# EAGLE board Serial-7-Segment-Display_Panel_v31b (EAGLE 7.5.0), part 1 of 6
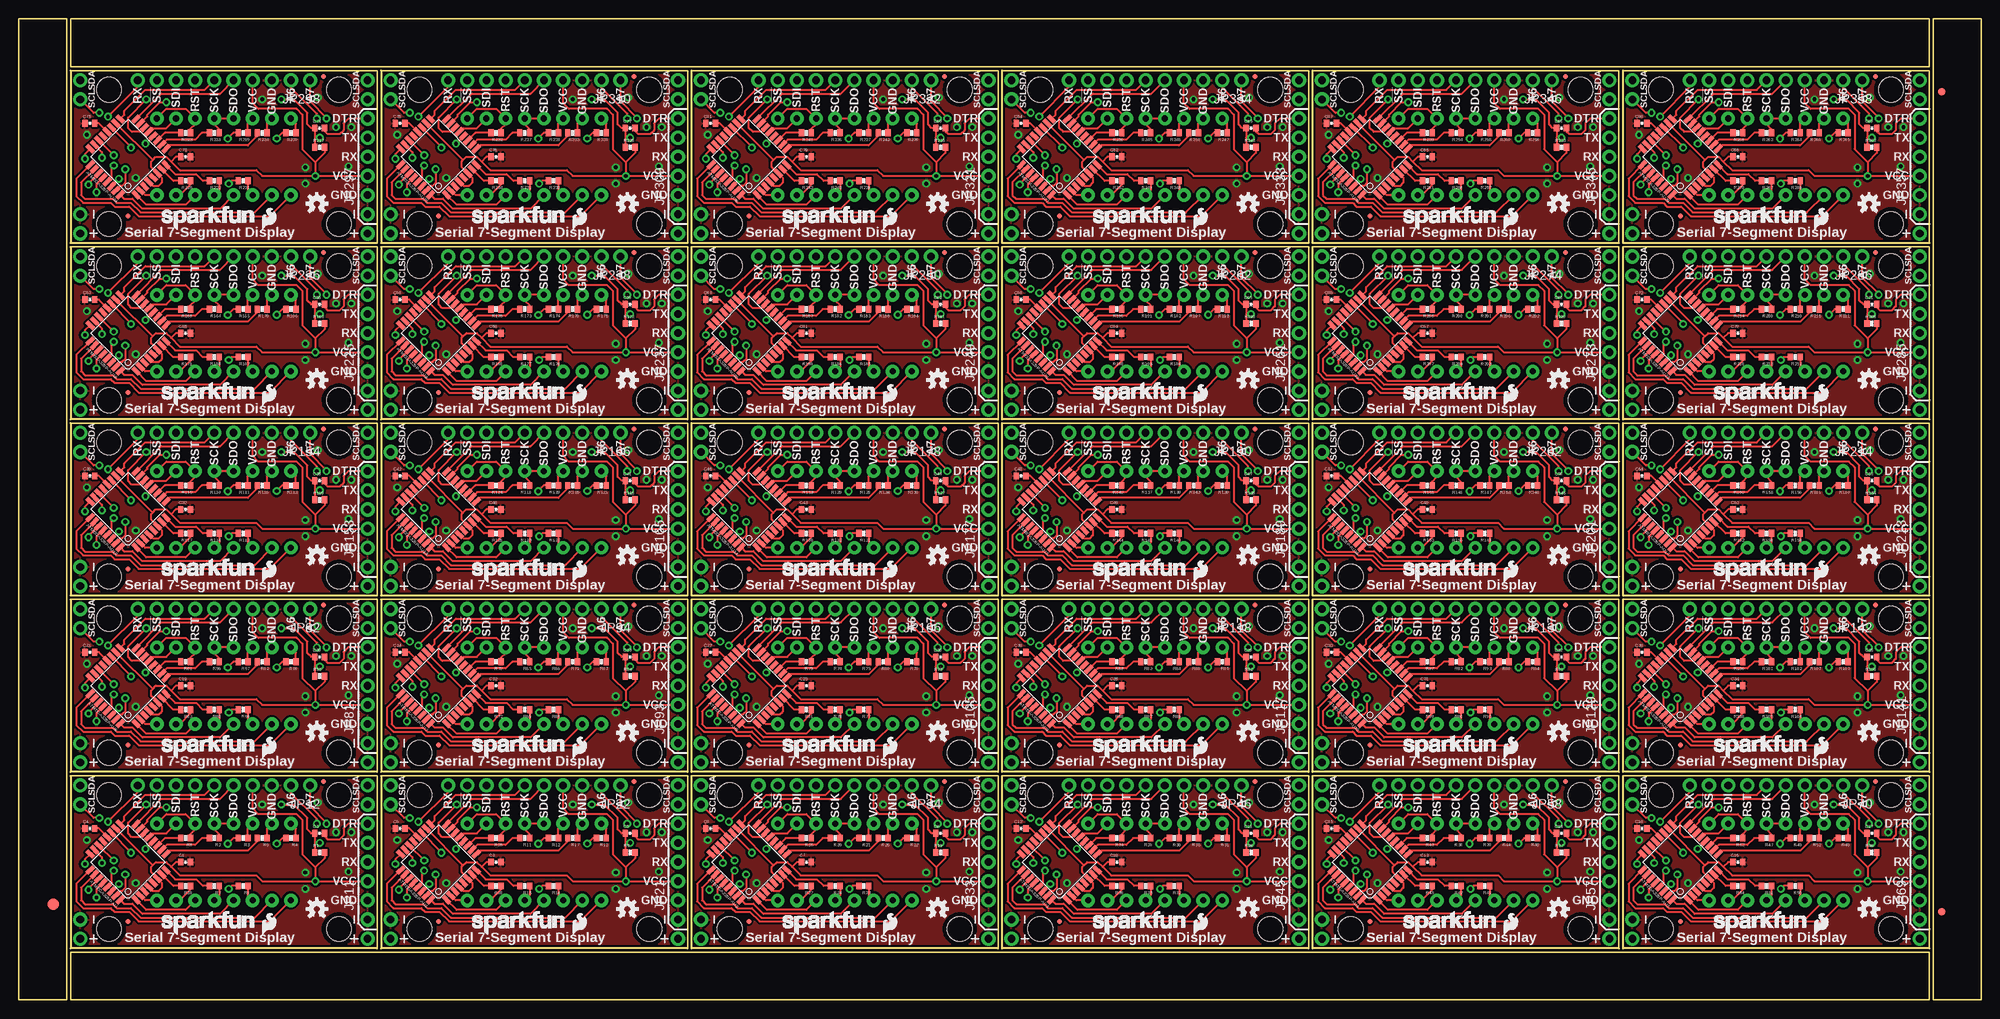
[diagram p0: board, top side]
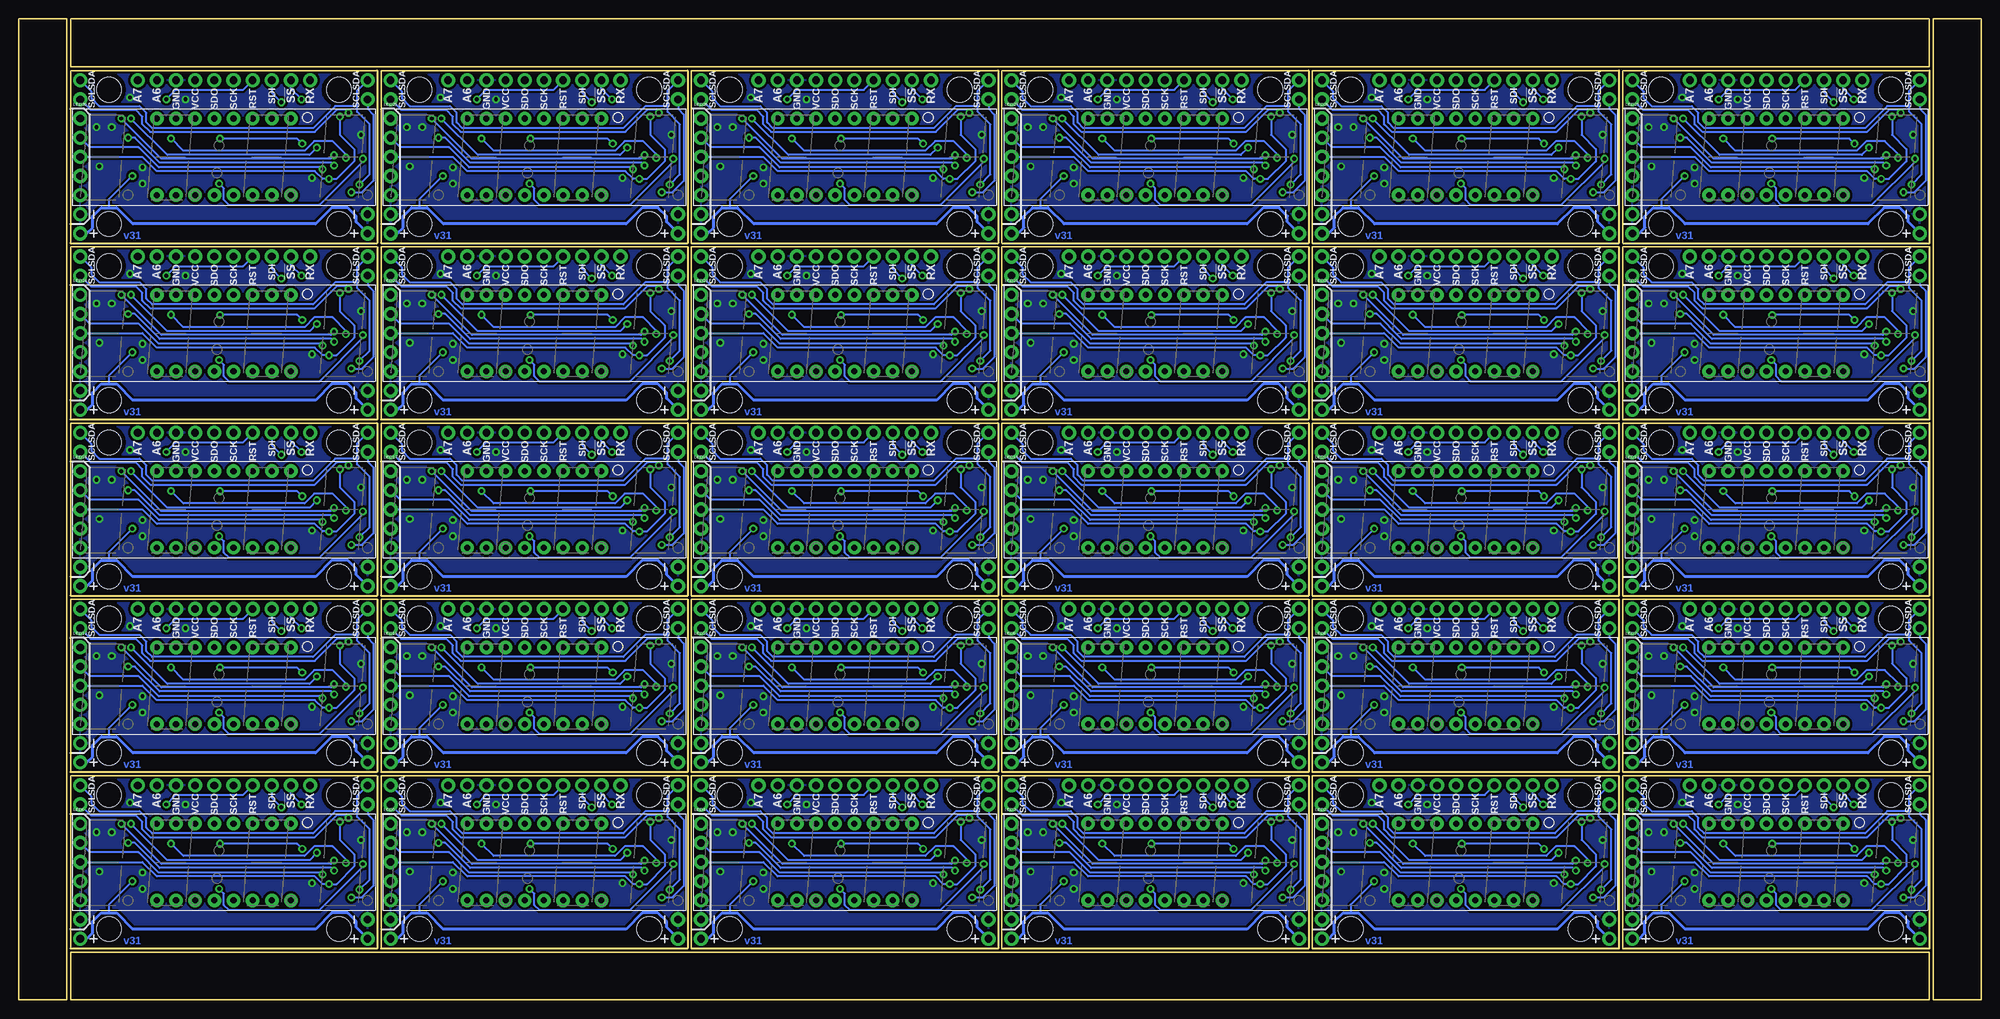
[diagram p1: board, bottom side, seen from below]

Size 260.1 x 130.05 mm. Coordinates in mm from the lower left corner, seen from the top.
Outline: 6.35,79.25 6.35,0 0,0 0,29.72
Outline: 0,27.18 0,130.05 6.35,130.05 6.35,76.71
Outline: 79.25,0 6.86,0 6.86,6.35 29.72,6.35
Outline: 27.18,6.35 253.24,6.35 253.24,0 76.71,0
Outline: 260.1,79.25 260.1,0 253.75,0 253.75,29.72
Outline: 253.75,27.18 253.75,130.05 260.1,130.05 260.1,76.71
Outline: 180.85,130.05 253.24,130.05 253.24,123.7 230.38,123.7
Outline: 232.92,123.7 6.86,123.7 6.86,130.05 183.39,130.05
Outline: 6.86,29.72 47.5,29.72 47.5,6.86 6.86,6.86 6.86,29.72
Outline: 48.01,29.72 88.65,29.72 88.65,6.86 48.01,6.86 48.01,29.72
Outline: 89.15,29.72 129.79,29.72 129.79,6.86 89.15,6.86 89.15,29.72
Outline: 130.3,29.72 170.94,29.72 170.94,6.86 130.3,6.86 130.3,29.72
Outline: 171.45,29.72 212.09,29.72 212.09,6.86 171.45,6.86 171.45,29.72
Outline: 212.6,29.72 253.24,29.72 253.24,6.86 212.6,6.86 212.6,29.72
Outline: 6.86,53.09 47.5,53.09 47.5,30.23 6.86,30.23 6.86,53.09
Outline: 48.01,53.09 88.65,53.09 88.65,30.23 48.01,30.23 48.01,53.09
Outline: 89.15,53.09 129.79,53.09 129.79,30.23 89.15,30.23 89.15,53.09
Outline: 130.3,53.09 170.94,53.09 170.94,30.23 130.3,30.23 130.3,53.09
Outline: 171.45,53.09 212.09,53.09 212.09,30.23 171.45,30.23 171.45,53.09
Outline: 212.6,53.09 253.24,53.09 253.24,30.23 212.6,30.23 212.6,53.09
Outline: 6.86,76.45 47.5,76.45 47.5,53.59 6.86,53.59 6.86,76.45
Outline: 48.01,76.45 88.65,76.45 88.65,53.59 48.01,53.59 48.01,76.45
Outline: 89.15,76.45 129.79,76.45 129.79,53.59 89.15,53.59 89.15,76.45
Outline: 130.3,76.45 170.94,76.45 170.94,53.59 130.3,53.59 130.3,76.45
Outline: 171.45,76.45 212.09,76.45 212.09,53.59 171.45,53.59 171.45,76.45
Outline: 212.6,76.45 253.24,76.45 253.24,53.59 212.6,53.59 212.6,76.45
Outline: 6.86,99.82 47.5,99.82 47.5,76.96 6.86,76.96 6.86,99.82
Outline: 48.01,99.82 88.65,99.82 88.65,76.96 48.01,76.96 48.01,99.82
Outline: 89.15,99.82 129.79,99.82 129.79,76.96 89.15,76.96 89.15,99.82
Outline: 130.3,99.82 170.94,99.82 170.94,76.96 130.3,76.96 130.3,99.82
Outline: 171.45,99.82 212.09,99.82 212.09,76.96 171.45,76.96 171.45,99.82
Outline: 212.6,99.82 253.24,99.82 253.24,76.96 212.6,76.96 212.6,99.82
Outline: 6.86,123.19 47.5,123.19 47.5,100.33 6.86,100.33 6.86,123.19
Outline: 48.01,123.19 88.65,123.19 88.65,100.33 48.01,100.33 48.01,123.19
Outline: 89.15,123.19 129.79,123.19 129.79,100.33 89.15,100.33 89.15,123.19
Outline: 130.3,123.19 170.94,123.19 170.94,100.33 130.3,100.33 130.3,123.19
Outline: 171.45,123.19 212.09,123.19 212.09,100.33 171.45,100.33 171.45,123.19
Outline: 212.6,123.19 253.24,123.19 253.24,100.33 212.6,100.33 212.6,123.19
Copper layers (1*16): Top 0.035mm / dielectric 1.5mm / Bottom 0.035mm
Design rules "default": minimum track width 8mil, minimum drill 20mil, track to track 8mil, track to pad 8mil, pad to pad 8mil, via to via 8mil, smd to smd 8mil, copper to edge 8mil, drill to drill 8mil, minimum pad ring 12mil, minimum via ring 10mil, stop-mask expansion 4mil, vias tented up to drill 20mil, thermal gap 10mil

## Footprints (pad centres in the part's own frame; a part is rotated, then mirrored left to right if it is on the bottom)
TQFP32-08 = smd 1.27 x 0.559: 1 -4.293,2.8; 2 -4.293,2; 3 -4.293,1.2; 4 -4.293,0.4; 5 -4.293,-0.4; 6 -4.293,-1.2; 7 -4.293,-2; 8 -4.293,-2.8; 17 4.293,-2.8; 18 4.293,-2; 19 4.293,-1.2; 20 4.293,-0.4; 21 4.293,0.4; 22 4.293,1.2; 23 4.293,2; 24 4.293,2.8 | smd 0.559 x 1.27: 9 -2.8,-4.293; 10 -2,-4.293; 11 -1.2,-4.293; 12 -0.4,-4.293; 13 0.4,-4.293; 14 1.2,-4.293; 15 2,-4.293; 16 2.8,-4.293; 25 2.8,4.293; 26 2,4.293; 27 1.2,4.293; 28 0.4,4.293; 29 -0.4,4.293; 30 -1.2,4.293; 31 -2,4.293; 32 -2.8,4.293
0402-CAP = smd 0.7 x 0.9: 1 -0.65,0; 2 0.65,0
FIDUCIAL-1.5X3 = smd 1.5 x 1.5: 1 0,0
FIDUCIAL-1X2 = smd 1 x 1: 1 0,0
STAND-OFF = hole 3.302: 0,0
1X02_NO_SILK = drill 1.016 pad 1.88: 1 0,0; 2 2.54,0
MICRO-FIDUCIAL = smd 0.635 x 0.635: 1 0,0
1X05_NO_SILK = drill 1.016 pad 1.88: 1 0,0; 2 2.54,0; 3 5.08,0; 4 7.62,0; 5 10.16,0
1X10_NO_SILK = drill 1.016 pad 1.88: 1 0,0; 2 2.54,0; 3 5.08,0; 4 7.62,0; 5 10.16,0; 6 12.7,0; 7 15.24,0; 8 17.78,0; 9 20.32,0; 10 22.86,0
7-SEGMENT-4DIGIT-YOUNGSUN = drill 0.8 pad 1.778: 1 -8.89,-5.08; 2 -6.35,-5.08; 3 -3.81,-5.08; 4 -1.27,-5.08; 5 1.27,-5.08; 6 3.81,-5.08; 7 6.35,-5.08; 8 8.89,-5.08; 9 8.89,5.08; 10 6.35,5.08; 11 3.81,5.08; 12 1.27,5.08; 13 -1.27,5.08; 14 -3.81,5.08; 15 -6.35,5.08; 16 -8.89,5.08
0402-RES = smd 0.7 x 0.9: 1 -0.65,0; 2 0.65,0

## Placement (x,y rotation side)
ATMEGA328P-AU  ATMEGA328P-AU  [TQFP32-08]  14.48,18.29 135 top
ATMEGA328P-AU1  ATMEGA328P-AU  [TQFP32-08]  55.63,18.29 135 top
ATMEGA328P-AU2  ATMEGA328P-AU  [TQFP32-08]  96.77,18.29 135 top
ATMEGA328P-AU3  ATMEGA328P-AU  [TQFP32-08]  137.92,18.29 135 top
ATMEGA328P-AU4  ATMEGA328P-AU  [TQFP32-08]  179.07,18.29 135 top
ATMEGA328P-AU5  ATMEGA328P-AU  [TQFP32-08]  220.22,18.29 135 top
ATMEGA328P-AU6  ATMEGA328P-AU  [TQFP32-08]  14.48,41.66 135 top
ATMEGA328P-AU7  ATMEGA328P-AU  [TQFP32-08]  55.63,41.66 135 top
ATMEGA328P-AU8  ATMEGA328P-AU  [TQFP32-08]  96.77,41.66 135 top
ATMEGA328P-AU9  ATMEGA328P-AU  [TQFP32-08]  137.92,41.66 135 top
ATMEGA328P-AU10  ATMEGA328P-AU  [TQFP32-08]  179.07,41.66 135 top
ATMEGA328P-AU11  ATMEGA328P-AU  [TQFP32-08]  220.22,41.66 135 top
ATMEGA328P-AU12  ATMEGA328P-AU  [TQFP32-08]  14.48,65.02 135 top
ATMEGA328P-AU13  ATMEGA328P-AU  [TQFP32-08]  55.63,65.02 135 top
ATMEGA328P-AU14  ATMEGA328P-AU  [TQFP32-08]  96.77,65.02 135 top
ATMEGA328P-AU15  ATMEGA328P-AU  [TQFP32-08]  137.92,65.02 135 top
ATMEGA328P-AU16  ATMEGA328P-AU  [TQFP32-08]  179.07,65.02 135 top
ATMEGA328P-AU17  ATMEGA328P-AU  [TQFP32-08]  220.22,65.02 135 top
ATMEGA328P-AU18  ATMEGA328P-AU  [TQFP32-08]  14.48,88.39 135 top
ATMEGA328P-AU19  ATMEGA328P-AU  [TQFP32-08]  55.63,88.39 135 top
ATMEGA328P-AU20  ATMEGA328P-AU  [TQFP32-08]  96.77,88.39 135 top
ATMEGA328P-AU21  ATMEGA328P-AU  [TQFP32-08]  137.92,88.39 135 top
ATMEGA328P-AU22  ATMEGA328P-AU  [TQFP32-08]  179.07,88.39 135 top
ATMEGA328P-AU23  ATMEGA328P-AU  [TQFP32-08]  220.22,88.39 135 top
ATMEGA328P-AU24  ATMEGA328P-AU  [TQFP32-08]  14.48,111.76 135 top
ATMEGA328P-AU25  ATMEGA328P-AU  [TQFP32-08]  55.63,111.76 135 top
ATMEGA328P-AU26  ATMEGA328P-AU  [TQFP32-08]  96.77,111.76 135 top
ATMEGA328P-AU27  ATMEGA328P-AU  [TQFP32-08]  137.92,111.76 135 top
ATMEGA328P-AU28  ATMEGA328P-AU  [TQFP32-08]  179.07,111.76 135 top
ATMEGA328P-AU29  ATMEGA328P-AU  [TQFP32-08]  220.22,111.76 135 top
C1  0.1uF  [0402-CAP]  22.1,18.29 0 top
C2  0.1uF  [0402-CAP]  63.25,18.29 0 top
C3  0.1uF  [0402-CAP]  39.88,22.1 0 top
C4  0.1uF  [0402-CAP]  9.4,22.73 0 top
C5  0.1uF  [0402-CAP]  81.03,22.1 0 top
C6  0.1uF  [0402-CAP]  50.55,22.73 0 top
C7  0.1uF  [0402-CAP]  104.39,18.29 0 top
C8  0.1uF  [0402-CAP]  122.17,22.1 0 top
C9  0.1uF  [0402-CAP]  91.69,22.73 0 top
C10  0.1uF  [0402-CAP]  145.54,18.29 0 top
C11  0.1uF  [0402-CAP]  163.32,22.1 0 top
C12  0.1uF  [0402-CAP]  132.84,22.73 0 top
C13  0.1uF  [0402-CAP]  186.69,18.29 0 top
C14  0.1uF  [0402-CAP]  204.47,22.1 0 top
C15  0.1uF  [0402-CAP]  173.99,22.73 0 top
C16  0.1uF  [0402-CAP]  227.84,18.29 0 top
C17  0.1uF  [0402-CAP]  245.62,22.1 0 top
C18  0.1uF  [0402-CAP]  215.14,22.73 0 top
C19  0.1uF  [0402-CAP]  22.1,41.66 0 top
C20  0.1uF  [0402-CAP]  39.88,45.47 0 top
C21  0.1uF  [0402-CAP]  9.4,46.1 0 top
C22  0.1uF  [0402-CAP]  63.25,41.66 0 top
C23  0.1uF  [0402-CAP]  81.03,45.47 0 top
C24  0.1uF  [0402-CAP]  50.55,46.1 0 top
C25  0.1uF  [0402-CAP]  104.39,41.66 0 top
C26  0.1uF  [0402-CAP]  122.17,45.47 0 top
C27  0.1uF  [0402-CAP]  91.69,46.1 0 top
C28  0.1uF  [0402-CAP]  145.54,41.66 0 top
C29  0.1uF  [0402-CAP]  163.32,45.47 0 top
C30  0.1uF  [0402-CAP]  132.84,46.1 0 top
C31  0.1uF  [0402-CAP]  186.69,41.66 0 top
C32  0.1uF  [0402-CAP]  204.47,45.47 0 top
C33  0.1uF  [0402-CAP]  173.99,46.1 0 top
C34  0.1uF  [0402-CAP]  227.84,41.66 0 top
C35  0.1uF  [0402-CAP]  245.62,45.47 0 top
C36  0.1uF  [0402-CAP]  215.14,46.1 0 top
C37  0.1uF  [0402-CAP]  22.1,65.02 0 top
C38  0.1uF  [0402-CAP]  39.88,68.83 0 top
C39  0.1uF  [0402-CAP]  9.4,69.47 0 top
C40  0.1uF  [0402-CAP]  63.25,65.02 0 top
C41  0.1uF  [0402-CAP]  81.03,68.83 0 top
C42  0.1uF  [0402-CAP]  50.55,69.47 0 top
C43  0.1uF  [0402-CAP]  104.39,65.02 0 top
C44  0.1uF  [0402-CAP]  122.17,68.83 0 top
C45  0.1uF  [0402-CAP]  91.69,69.47 0 top
C46  0.1uF  [0402-CAP]  145.54,65.02 0 top
C47  0.1uF  [0402-CAP]  163.32,68.83 0 top
C48  0.1uF  [0402-CAP]  132.84,69.47 0 top
C49  0.1uF  [0402-CAP]  186.69,65.02 0 top
C50  0.1uF  [0402-CAP]  204.47,68.83 0 top
C51  0.1uF  [0402-CAP]  173.99,69.47 0 top
C52  0.1uF  [0402-CAP]  227.84,65.02 0 top
C53  0.1uF  [0402-CAP]  245.62,68.83 0 top
C54  0.1uF  [0402-CAP]  215.14,69.47 0 top
C55  0.1uF  [0402-CAP]  22.1,88.39 0 top
C56  0.1uF  [0402-CAP]  39.88,92.2 0 top
C57  0.1uF  [0402-CAP]  9.4,92.84 0 top
C58  0.1uF  [0402-CAP]  63.25,88.39 0 top
C59  0.1uF  [0402-CAP]  81.03,92.2 0 top
C60  0.1uF  [0402-CAP]  50.55,92.84 0 top
C61  0.1uF  [0402-CAP]  104.39,88.39 0 top
C62  0.1uF  [0402-CAP]  122.17,92.2 0 top
C63  0.1uF  [0402-CAP]  91.69,92.84 0 top
C64  0.1uF  [0402-CAP]  145.54,88.39 0 top
C65  0.1uF  [0402-CAP]  163.32,92.2 0 top
C66  0.1uF  [0402-CAP]  132.84,92.84 0 top
C67  0.1uF  [0402-CAP]  186.69,88.39 0 top
C68  0.1uF  [0402-CAP]  204.47,92.2 0 top
C69  0.1uF  [0402-CAP]  173.99,92.84 0 top
C70  0.1uF  [0402-CAP]  227.84,88.39 0 top
C71  0.1uF  [0402-CAP]  245.62,92.2 0 top
C72  0.1uF  [0402-CAP]  215.14,92.84 0 top
C73  0.1uF  [0402-CAP]  22.1,111.76 0 top
C74  0.1uF  [0402-CAP]  39.88,115.57 0 top
C75  0.1uF  [0402-CAP]  9.4,116.2 0 top
C76  0.1uF  [0402-CAP]  63.25,111.76 0 top
C77  0.1uF  [0402-CAP]  81.03,115.57 0 top
C78  0.1uF  [0402-CAP]  50.55,116.2 0 top
C79  0.1uF  [0402-CAP]  104.39,111.76 0 top
C80  0.1uF  [0402-CAP]  122.17,115.57 0 top
C81  0.1uF  [0402-CAP]  91.69,116.2 0 top
C82  0.1uF  [0402-CAP]  145.54,111.76 0 top
C83  0.1uF  [0402-CAP]  163.32,115.57 0 top
C84  0.1uF  [0402-CAP]  132.84,116.2 0 top
C85  0.1uF  [0402-CAP]  186.69,111.76 0 top
C86  0.1uF  [0402-CAP]  204.47,115.57 0 top
C87  0.1uF  [0402-CAP]  173.99,116.2 0 top
C88  0.1uF  [0402-CAP]  227.84,111.76 0 top
C89  0.1uF  [0402-CAP]  245.62,115.57 0 top
C90  0.1uF  [0402-CAP]  215.14,116.2 0 top
E$1  [FIDUCIAL-1.5X3]  4.57,12.7 0 top
E$5  [FIDUCIAL-1X2]  254.89,11.68 0 top
E$6  [FIDUCIAL-1X2]  254.89,120.4 180 top
JP1  STAND-OFF  [STAND-OFF]  11.94,9.4 0 top
JP2  [1X02_NO_SILK]  46.23,28.45 270 top
JP3  STAND-OFF  [STAND-OFF]  11.94,27.18 0 top
JP4  STAND-OFF  [STAND-OFF]  42.42,9.4 0 top
JP5  STAND-OFF  [STAND-OFF]  42.42,27.18 0 top
JP6  [1X02_NO_SILK]  8.13,8.13 90 top
JP7  [1X02_NO_SILK]  8.13,28.45 270 top
JP8  [1X02_NO_SILK]  46.23,8.13 90 top
JP9  FIDUCIALUFIDUCIAL  [MICRO-FIDUCIAL]  40.39,28.96 0 top
JP10  FIDUCIALUFIDUCIAL  [MICRO-FIDUCIAL]  14.48,10.41 0 top
JP11  [1X05_NO_SILK]  46.23,13.21 90 top
JP12  M10SIP_NS  [1X10_NO_SILK]  38.61,28.45 180 top
JP13  STAND-OFF  [STAND-OFF]  53.09,9.4 0 top
JP14  STAND-OFF  [STAND-OFF]  53.09,27.18 0 top
JP15  STAND-OFF  [STAND-OFF]  83.57,9.4 0 top
JP16  STAND-OFF  [STAND-OFF]  83.57,27.18 0 top
JP17  [1X02_NO_SILK]  49.28,8.13 90 top
JP18  [1X02_NO_SILK]  49.28,28.45 270 top
JP19  [1X02_NO_SILK]  87.38,8.13 90 top
JP20  [1X02_NO_SILK]  87.38,28.45 270 top
JP21  [1X05_NO_SILK]  87.38,13.21 90 top
JP22  M10SIP_NS  [1X10_NO_SILK]  79.76,28.45 180 top
JP23  FIDUCIALUFIDUCIAL  [MICRO-FIDUCIAL]  81.53,28.96 0 top
JP24  FIDUCIALUFIDUCIAL  [MICRO-FIDUCIAL]  55.63,10.41 0 top
JP25  STAND-OFF  [STAND-OFF]  94.23,9.4 0 top
JP26  STAND-OFF  [STAND-OFF]  94.23,27.18 0 top
JP27  STAND-OFF  [STAND-OFF]  124.71,9.4 0 top
JP28  STAND-OFF  [STAND-OFF]  124.71,27.18 0 top
JP29  [1X02_NO_SILK]  90.42,8.13 90 top
JP30  [1X02_NO_SILK]  90.42,28.45 270 top
JP31  [1X02_NO_SILK]  128.52,8.13 90 top
JP32  [1X02_NO_SILK]  128.52,28.45 270 top
JP33  [1X05_NO_SILK]  128.52,13.21 90 top
JP34  M10SIP_NS  [1X10_NO_SILK]  120.9,28.45 180 top
JP35  FIDUCIALUFIDUCIAL  [MICRO-FIDUCIAL]  122.68,28.96 0 top
JP36  FIDUCIALUFIDUCIAL  [MICRO-FIDUCIAL]  96.77,10.41 0 top
JP37  STAND-OFF  [STAND-OFF]  135.38,9.4 0 top
JP38  STAND-OFF  [STAND-OFF]  135.38,27.18 0 top
JP39  STAND-OFF  [STAND-OFF]  165.86,9.4 0 top
JP40  STAND-OFF  [STAND-OFF]  165.86,27.18 0 top
JP41  [1X02_NO_SILK]  131.57,8.13 90 top
JP42  [1X02_NO_SILK]  131.57,28.45 270 top
JP43  [1X02_NO_SILK]  169.67,8.13 90 top
JP44  [1X02_NO_SILK]  169.67,28.45 270 top
JP45  [1X05_NO_SILK]  169.67,13.21 90 top
JP46  M10SIP_NS  [1X10_NO_SILK]  162.05,28.45 180 top
JP47  FIDUCIALUFIDUCIAL  [MICRO-FIDUCIAL]  163.83,28.96 0 top
JP48  FIDUCIALUFIDUCIAL  [MICRO-FIDUCIAL]  137.92,10.41 0 top
JP49  STAND-OFF  [STAND-OFF]  176.53,9.4 0 top
JP50  STAND-OFF  [STAND-OFF]  176.53,27.18 0 top
JP51  STAND-OFF  [STAND-OFF]  207.01,9.4 0 top
JP52  STAND-OFF  [STAND-OFF]  207.01,27.18 0 top
JP53  [1X02_NO_SILK]  172.72,8.13 90 top
JP54  [1X02_NO_SILK]  172.72,28.45 270 top
JP55  [1X02_NO_SILK]  210.82,8.13 90 top
JP56  [1X02_NO_SILK]  210.82,28.45 270 top
JP57  [1X05_NO_SILK]  210.82,13.21 90 top
JP58  M10SIP_NS  [1X10_NO_SILK]  203.2,28.45 180 top
JP59  FIDUCIALUFIDUCIAL  [MICRO-FIDUCIAL]  204.98,28.96 0 top
JP60  FIDUCIALUFIDUCIAL  [MICRO-FIDUCIAL]  179.07,10.41 0 top
JP61  STAND-OFF  [STAND-OFF]  217.68,9.4 0 top
JP62  STAND-OFF  [STAND-OFF]  217.68,27.18 0 top
JP63  STAND-OFF  [STAND-OFF]  248.16,9.4 0 top
JP64  STAND-OFF  [STAND-OFF]  248.16,27.18 0 top
JP65  [1X02_NO_SILK]  213.87,8.13 90 top
JP66  [1X02_NO_SILK]  213.87,28.45 270 top
JP67  [1X02_NO_SILK]  251.97,8.13 90 top
JP68  [1X02_NO_SILK]  251.97,28.45 270 top
JP69  [1X05_NO_SILK]  251.97,13.21 90 top
JP70  M10SIP_NS  [1X10_NO_SILK]  244.35,28.45 180 top
JP71  FIDUCIALUFIDUCIAL  [MICRO-FIDUCIAL]  246.13,28.96 0 top
JP72  FIDUCIALUFIDUCIAL  [MICRO-FIDUCIAL]  220.22,10.41 0 top
JP73  STAND-OFF  [STAND-OFF]  11.94,32.77 0 top
JP74  STAND-OFF  [STAND-OFF]  11.94,50.55 0 top
JP75  STAND-OFF  [STAND-OFF]  42.42,32.77 0 top
JP76  STAND-OFF  [STAND-OFF]  42.42,50.55 0 top
JP77  [1X02_NO_SILK]  8.13,31.5 90 top
JP78  [1X02_NO_SILK]  8.13,51.82 270 top
JP79  [1X02_NO_SILK]  46.23,31.5 90 top
JP80  [1X02_NO_SILK]  46.23,51.82 270 top
JP81  [1X05_NO_SILK]  46.23,36.58 90 top
JP82  M10SIP_NS  [1X10_NO_SILK]  38.61,51.82 180 top
JP83  FIDUCIALUFIDUCIAL  [MICRO-FIDUCIAL]  40.39,52.32 0 top
JP84  FIDUCIALUFIDUCIAL  [MICRO-FIDUCIAL]  14.48,33.78 0 top
JP85  STAND-OFF  [STAND-OFF]  53.09,32.77 0 top
JP86  STAND-OFF  [STAND-OFF]  53.09,50.55 0 top
JP87  STAND-OFF  [STAND-OFF]  83.57,32.77 0 top
JP88  STAND-OFF  [STAND-OFF]  83.57,50.55 0 top
JP89  [1X02_NO_SILK]  49.28,31.5 90 top
JP90  [1X02_NO_SILK]  49.28,51.82 270 top
JP91  [1X02_NO_SILK]  87.38,31.5 90 top
JP92  [1X02_NO_SILK]  87.38,51.82 270 top
JP93  [1X05_NO_SILK]  87.38,36.58 90 top
JP94  M10SIP_NS  [1X10_NO_SILK]  79.76,51.82 180 top
JP95  FIDUCIALUFIDUCIAL  [MICRO-FIDUCIAL]  81.53,52.32 0 top
JP96  FIDUCIALUFIDUCIAL  [MICRO-FIDUCIAL]  55.63,33.78 0 top
JP97  STAND-OFF  [STAND-OFF]  94.23,32.77 0 top
JP98  STAND-OFF  [STAND-OFF]  94.23,50.55 0 top
JP99  STAND-OFF  [STAND-OFF]  124.71,32.77 0 top
JP100  STAND-OFF  [STAND-OFF]  124.71,50.55 0 top
JP101  [1X02_NO_SILK]  90.42,31.5 90 top
JP102  [1X02_NO_SILK]  90.42,51.82 270 top
JP103  [1X02_NO_SILK]  128.52,31.5 90 top
JP104  [1X02_NO_SILK]  128.52,51.82 270 top
JP105  [1X05_NO_SILK]  128.52,36.58 90 top
JP106  M10SIP_NS  [1X10_NO_SILK]  120.9,51.82 180 top
JP107  FIDUCIALUFIDUCIAL  [MICRO-FIDUCIAL]  122.68,52.32 0 top
JP108  FIDUCIALUFIDUCIAL  [MICRO-FIDUCIAL]  96.77,33.78 0 top
JP109  STAND-OFF  [STAND-OFF]  135.38,32.77 0 top
JP110  STAND-OFF  [STAND-OFF]  135.38,50.55 0 top
JP111  STAND-OFF  [STAND-OFF]  165.86,32.77 0 top
JP112  STAND-OFF  [STAND-OFF]  165.86,50.55 0 top
JP113  [1X02_NO_SILK]  131.57,31.5 90 top
JP114  [1X02_NO_SILK]  131.57,51.82 270 top
JP115  [1X02_NO_SILK]  169.67,31.5 90 top
JP116  [1X02_NO_SILK]  169.67,51.82 270 top
JP117  [1X05_NO_SILK]  169.67,36.58 90 top
JP118  M10SIP_NS  [1X10_NO_SILK]  162.05,51.82 180 top
JP119  FIDUCIALUFIDUCIAL  [MICRO-FIDUCIAL]  163.83,52.32 0 top
JP120  FIDUCIALUFIDUCIAL  [MICRO-FIDUCIAL]  137.92,33.78 0 top
JP121  STAND-OFF  [STAND-OFF]  176.53,32.77 0 top
JP122  STAND-OFF  [STAND-OFF]  176.53,50.55 0 top
JP123  STAND-OFF  [STAND-OFF]  207.01,32.77 0 top
JP124  STAND-OFF  [STAND-OFF]  207.01,50.55 0 top
JP125  [1X02_NO_SILK]  172.72,31.5 90 top
JP126  [1X02_NO_SILK]  172.72,51.82 270 top
JP127  [1X02_NO_SILK]  210.82,31.5 90 top
JP128  [1X02_NO_SILK]  210.82,51.82 270 top
JP129  [1X05_NO_SILK]  210.82,36.58 90 top
JP130  M10SIP_NS  [1X10_NO_SILK]  203.2,51.82 180 top
JP131  FIDUCIALUFIDUCIAL  [MICRO-FIDUCIAL]  204.98,52.32 0 top
JP132  FIDUCIALUFIDUCIAL  [MICRO-FIDUCIAL]  179.07,33.78 0 top
JP133  STAND-OFF  [STAND-OFF]  217.68,32.77 0 top
JP134  STAND-OFF  [STAND-OFF]  217.68,50.55 0 top
JP135  STAND-OFF  [STAND-OFF]  248.16,32.77 0 top
JP136  STAND-OFF  [STAND-OFF]  248.16,50.55 0 top
JP137  [1X02_NO_SILK]  213.87,31.5 90 top
JP138  [1X02_NO_SILK]  213.87,51.82 270 top
JP139  [1X02_NO_SILK]  251.97,31.5 90 top
JP140  [1X02_NO_SILK]  251.97,51.82 270 top
JP141  [1X05_NO_SILK]  251.97,36.58 90 top
JP142  M10SIP_NS  [1X10_NO_SILK]  244.35,51.82 180 top
JP143  FIDUCIALUFIDUCIAL  [MICRO-FIDUCIAL]  246.13,52.32 0 top
JP144  FIDUCIALUFIDUCIAL  [MICRO-FIDUCIAL]  220.22,33.78 0 top
JP145  STAND-OFF  [STAND-OFF]  11.94,56.13 0 top
JP146  STAND-OFF  [STAND-OFF]  11.94,73.91 0 top
JP147  STAND-OFF  [STAND-OFF]  42.42,56.13 0 top
JP148  STAND-OFF  [STAND-OFF]  42.42,73.91 0 top
JP149  [1X02_NO_SILK]  8.13,54.86 90 top
JP150  [1X02_NO_SILK]  8.13,75.18 270 top
JP151  [1X02_NO_SILK]  46.23,54.86 90 top
JP152  [1X02_NO_SILK]  46.23,75.18 270 top
JP153  [1X05_NO_SILK]  46.23,59.94 90 top
JP154  M10SIP_NS  [1X10_NO_SILK]  38.61,75.18 180 top
JP155  FIDUCIALUFIDUCIAL  [MICRO-FIDUCIAL]  40.39,75.69 0 top
JP156  FIDUCIALUFIDUCIAL  [MICRO-FIDUCIAL]  14.48,57.15 0 top
JP157  STAND-OFF  [STAND-OFF]  53.09,56.13 0 top
JP158  STAND-OFF  [STAND-OFF]  53.09,73.91 0 top
JP159  STAND-OFF  [STAND-OFF]  83.57,56.13 0 top
JP160  STAND-OFF  [STAND-OFF]  83.57,73.91 0 top
JP161  [1X02_NO_SILK]  49.28,54.86 90 top
JP162  [1X02_NO_SILK]  49.28,75.18 270 top
JP163  [1X02_NO_SILK]  87.38,54.86 90 top
JP164  [1X02_NO_SILK]  87.38,75.18 270 top
JP165  [1X05_NO_SILK]  87.38,59.94 90 top
JP166  M10SIP_NS  [1X10_NO_SILK]  79.76,75.18 180 top
JP167  FIDUCIALUFIDUCIAL  [MICRO-FIDUCIAL]  81.53,75.69 0 top
JP168  FIDUCIALUFIDUCIAL  [MICRO-FIDUCIAL]  55.63,57.15 0 top
JP169  STAND-OFF  [STAND-OFF]  94.23,56.13 0 top
JP170  STAND-OFF  [STAND-OFF]  94.23,73.91 0 top
JP171  STAND-OFF  [STAND-OFF]  124.71,56.13 0 top
JP172  STAND-OFF  [STAND-OFF]  124.71,73.91 0 top
JP173  [1X02_NO_SILK]  90.42,54.86 90 top
JP174  [1X02_NO_SILK]  90.42,75.18 270 top
JP175  [1X02_NO_SILK]  128.52,54.86 90 top
JP176  [1X02_NO_SILK]  128.52,75.18 270 top
JP177  [1X05_NO_SILK]  128.52,59.94 90 top
JP178  M10SIP_NS  [1X10_NO_SILK]  120.9,75.18 180 top
JP179  FIDUCIALUFIDUCIAL  [MICRO-FIDUCIAL]  122.68,75.69 0 top
JP180  FIDUCIALUFIDUCIAL  [MICRO-FIDUCIAL]  96.77,57.15 0 top
JP181  STAND-OFF  [STAND-OFF]  135.38,56.13 0 top
JP182  STAND-OFF  [STAND-OFF]  135.38,73.91 0 top
JP183  STAND-OFF  [STAND-OFF]  165.86,56.13 0 top
JP184  STAND-OFF  [STAND-OFF]  165.86,73.91 0 top
JP185  [1X02_NO_SILK]  131.57,54.86 90 top
JP186  [1X02_NO_SILK]  131.57,75.18 270 top
JP187  [1X02_NO_SILK]  169.67,54.86 90 top
JP188  [1X02_NO_SILK]  169.67,75.18 270 top
JP189  [1X05_NO_SILK]  169.67,59.94 90 top
JP190  M10SIP_NS  [1X10_NO_SILK]  162.05,75.18 180 top
JP191  FIDUCIALUFIDUCIAL  [MICRO-FIDUCIAL]  163.83,75.69 0 top
JP192  FIDUCIALUFIDUCIAL  [MICRO-FIDUCIAL]  137.92,57.15 0 top
JP193  STAND-OFF  [STAND-OFF]  176.53,56.13 0 top
JP194  STAND-OFF  [STAND-OFF]  176.53,73.91 0 top
JP195  STAND-OFF  [STAND-OFF]  207.01,56.13 0 top
JP196  STAND-OFF  [STAND-OFF]  207.01,73.91 0 top
JP197  [1X02_NO_SILK]  172.72,54.86 90 top
JP198  [1X02_NO_SILK]  172.72,75.18 270 top
JP199  [1X02_NO_SILK]  210.82,54.86 90 top
JP200  [1X02_NO_SILK]  210.82,75.18 270 top
JP201  [1X05_NO_SILK]  210.82,59.94 90 top
JP202  M10SIP_NS  [1X10_NO_SILK]  203.2,75.18 180 top
JP203  FIDUCIALUFIDUCIAL  [MICRO-FIDUCIAL]  204.98,75.69 0 top
JP204  FIDUCIALUFIDUCIAL  [MICRO-FIDUCIAL]  179.07,57.15 0 top
JP205  STAND-OFF  [STAND-OFF]  217.68,56.13 0 top
JP206  STAND-OFF  [STAND-OFF]  217.68,73.91 0 top
JP207  STAND-OFF  [STAND-OFF]  248.16,56.13 0 top
JP208  STAND-OFF  [STAND-OFF]  248.16,73.91 0 top
JP209  [1X02_NO_SILK]  213.87,54.86 90 top
JP210  [1X02_NO_SILK]  213.87,75.18 270 top
JP211  [1X02_NO_SILK]  251.97,54.86 90 top
JP212  [1X02_NO_SILK]  251.97,75.18 270 top
JP213  [1X05_NO_SILK]  251.97,59.94 90 top
JP214  M10SIP_NS  [1X10_NO_SILK]  244.35,75.18 180 top
JP215  FIDUCIALUFIDUCIAL  [MICRO-FIDUCIAL]  246.13,75.69 0 top
JP216  FIDUCIALUFIDUCIAL  [MICRO-FIDUCIAL]  220.22,57.15 0 top
JP217  STAND-OFF  [STAND-OFF]  11.94,79.5 0 top
JP218  STAND-OFF  [STAND-OFF]  11.94,97.28 0 top
JP219  STAND-OFF  [STAND-OFF]  42.42,79.5 0 top
JP220  STAND-OFF  [STAND-OFF]  42.42,97.28 0 top
JP221  [1X02_NO_SILK]  8.13,78.23 90 top
JP222  [1X02_NO_SILK]  8.13,98.55 270 top
JP223  [1X02_NO_SILK]  46.23,78.23 90 top
JP224  [1X02_NO_SILK]  46.23,98.55 270 top
JP225  [1X05_NO_SILK]  46.23,83.31 90 top
JP226  M10SIP_NS  [1X10_NO_SILK]  38.61,98.55 180 top
JP227  FIDUCIALUFIDUCIAL  [MICRO-FIDUCIAL]  40.39,99.06 0 top
JP228  FIDUCIALUFIDUCIAL  [MICRO-FIDUCIAL]  14.48,80.52 0 top
JP229  STAND-OFF  [STAND-OFF]  53.09,79.5 0 top
JP230  STAND-OFF  [STAND-OFF]  53.09,97.28 0 top
JP231  STAND-OFF  [STAND-OFF]  83.57,79.5 0 top
JP232  STAND-OFF  [STAND-OFF]  83.57,97.28 0 top
JP233  [1X02_NO_SILK]  49.28,78.23 90 top
JP234  [1X02_NO_SILK]  49.28,98.55 270 top
JP235  [1X02_NO_SILK]  87.38,78.23 90 top
JP236  [1X02_NO_SILK]  87.38,98.55 270 top
JP237  [1X05_NO_SILK]  87.38,83.31 90 top
JP238  M10SIP_NS  [1X10_NO_SILK]  79.76,98.55 180 top
JP239  FIDUCIALUFIDUCIAL  [MICRO-FIDUCIAL]  81.53,99.06 0 top
JP240  FIDUCIALUFIDUCIAL  [MICRO-FIDUCIAL]  55.63,80.52 0 top
JP241  STAND-OFF  [STAND-OFF]  94.23,79.5 0 top
JP242  STAND-OFF  [STAND-OFF]  94.23,97.28 0 top
JP243  STAND-OFF  [STAND-OFF]  124.71,79.5 0 top
JP244  STAND-OFF  [STAND-OFF]  124.71,97.28 0 top
JP245  [1X02_NO_SILK]  90.42,78.23 90 top
JP246  [1X02_NO_SILK]  90.42,98.55 270 top
JP247  [1X02_NO_SILK]  128.52,78.23 90 top
JP248  [1X02_NO_SILK]  128.52,98.55 270 top
JP249  [1X05_NO_SILK]  128.52,83.31 90 top
JP250  M10SIP_NS  [1X10_NO_SILK]  120.9,98.55 180 top
JP251  FIDUCIALUFIDUCIAL  [MICRO-FIDUCIAL]  122.68,99.06 0 top
JP252  FIDUCIALUFIDUCIAL  [MICRO-FIDUCIAL]  96.77,80.52 0 top
JP253  STAND-OFF  [STAND-OFF]  135.38,79.5 0 top
JP254  STAND-OFF  [STAND-OFF]  135.38,97.28 0 top
JP255  STAND-OFF  [STAND-OFF]  165.86,79.5 0 top
JP256  STAND-OFF  [STAND-OFF]  165.86,97.28 0 top
JP257  [1X02_NO_SILK]  131.57,78.23 90 top
JP258  [1X02_NO_SILK]  131.57,98.55 270 top
JP259  [1X02_NO_SILK]  169.67,78.23 90 top
JP260  [1X02_NO_SILK]  169.67,98.55 270 top
JP261  [1X05_NO_SILK]  169.67,83.31 90 top
JP262  M10SIP_NS  [1X10_NO_SILK]  162.05,98.55 180 top
JP263  FIDUCIALUFIDUCIAL  [MICRO-FIDUCIAL]  163.83,99.06 0 top
JP264  FIDUCIALUFIDUCIAL  [MICRO-FIDUCIAL]  137.92,80.52 0 top
JP265  STAND-OFF  [STAND-OFF]  176.53,79.5 0 top
JP266  STAND-OFF  [STAND-OFF]  176.53,97.28 0 top
JP267  STAND-OFF  [STAND-OFF]  207.01,79.5 0 top
JP268  STAND-OFF  [STAND-OFF]  207.01,97.28 0 top
JP269  [1X02_NO_SILK]  172.72,78.23 90 top
JP270  [1X02_NO_SILK]  172.72,98.55 270 top
JP271  [1X02_NO_SILK]  210.82,78.23 90 top
JP272  [1X02_NO_SILK]  210.82,98.55 270 top
JP273  [1X05_NO_SILK]  210.82,83.31 90 top
JP274  M10SIP_NS  [1X10_NO_SILK]  203.2,98.55 180 top
JP275  FIDUCIALUFIDUCIAL  [MICRO-FIDUCIAL]  204.98,99.06 0 top
JP276  FIDUCIALUFIDUCIAL  [MICRO-FIDUCIAL]  179.07,80.52 0 top
JP277  STAND-OFF  [STAND-OFF]  217.68,79.5 0 top
JP278  STAND-OFF  [STAND-OFF]  217.68,97.28 0 top
JP279  STAND-OFF  [STAND-OFF]  248.16,79.5 0 top
JP280  STAND-OFF  [STAND-OFF]  248.16,97.28 0 top
JP281  [1X02_NO_SILK]  213.87,78.23 90 top
JP282  [1X02_NO_SILK]  213.87,98.55 270 top
JP283  [1X02_NO_SILK]  251.97,78.23 90 top
JP284  [1X02_NO_SILK]  251.97,98.55 270 top
JP285  [1X05_NO_SILK]  251.97,83.31 90 top
JP286  M10SIP_NS  [1X10_NO_SILK]  244.35,98.55 180 top
JP287  FIDUCIALUFIDUCIAL  [MICRO-FIDUCIAL]  246.13,99.06 0 top
JP288  FIDUCIALUFIDUCIAL  [MICRO-FIDUCIAL]  220.22,80.52 0 top
JP289  STAND-OFF  [STAND-OFF]  11.94,102.87 0 top
JP290  STAND-OFF  [STAND-OFF]  11.94,120.65 0 top
JP291  STAND-OFF  [STAND-OFF]  42.42,102.87 0 top
JP292  STAND-OFF  [STAND-OFF]  42.42,120.65 0 top
JP293  [1X02_NO_SILK]  8.13,101.6 90 top
JP294  [1X02_NO_SILK]  8.13,121.92 270 top
JP295  [1X02_NO_SILK]  46.23,101.6 90 top
JP296  [1X02_NO_SILK]  46.23,121.92 270 top
JP297  [1X05_NO_SILK]  46.23,106.68 90 top
JP298  M10SIP_NS  [1X10_NO_SILK]  38.61,121.92 180 top
JP299  FIDUCIALUFIDUCIAL  [MICRO-FIDUCIAL]  40.39,122.43 0 top
JP300  FIDUCIALUFIDUCIAL  [MICRO-FIDUCIAL]  14.48,103.89 0 top
JP301  STAND-OFF  [STAND-OFF]  53.09,102.87 0 top
JP302  STAND-OFF  [STAND-OFF]  53.09,120.65 0 top
JP303  STAND-OFF  [STAND-OFF]  83.57,102.87 0 top
JP304  STAND-OFF  [STAND-OFF]  83.57,120.65 0 top
JP305  [1X02_NO_SILK]  49.28,101.6 90 top
JP306  [1X02_NO_SILK]  49.28,121.92 270 top
JP307  [1X02_NO_SILK]  87.38,101.6 90 top
JP308  [1X02_NO_SILK]  87.38,121.92 270 top
JP309  [1X05_NO_SILK]  87.38,106.68 90 top
JP310  M10SIP_NS  [1X10_NO_SILK]  79.76,121.92 180 top
JP311  FIDUCIALUFIDUCIAL  [MICRO-FIDUCIAL]  81.53,122.43 0 top
JP312  FIDUCIALUFIDUCIAL  [MICRO-FIDUCIAL]  55.63,103.89 0 top
JP313  STAND-OFF  [STAND-OFF]  94.23,102.87 0 top
JP314  STAND-OFF  [STAND-OFF]  94.23,120.65 0 top
JP315  STAND-OFF  [STAND-OFF]  124.71,102.87 0 top
JP316  STAND-OFF  [STAND-OFF]  124.71,120.65 0 top
JP317  [1X02_NO_SILK]  90.42,101.6 90 top
JP318  [1X02_NO_SILK]  90.42,121.92 270 top
JP319  [1X02_NO_SILK]  128.52,101.6 90 top
JP320  [1X02_NO_SILK]  128.52,121.92 270 top
JP321  [1X05_NO_SILK]  128.52,106.68 90 top
JP322  M10SIP_NS  [1X10_NO_SILK]  120.9,121.92 180 top
JP323  FIDUCIALUFIDUCIAL  [MICRO-FIDUCIAL]  122.68,122.43 0 top
JP324  FIDUCIALUFIDUCIAL  [MICRO-FIDUCIAL]  96.77,103.89 0 top
JP325  STAND-OFF  [STAND-OFF]  135.38,102.87 0 top
JP326  STAND-OFF  [STAND-OFF]  135.38,120.65 0 top
JP327  STAND-OFF  [STAND-OFF]  165.86,102.87 0 top
JP328  STAND-OFF  [STAND-OFF]  165.86,120.65 0 top
JP329  [1X02_NO_SILK]  131.57,101.6 90 top
JP330  [1X02_NO_SILK]  131.57,121.92 270 top
JP331  [1X02_NO_SILK]  169.67,101.6 90 top
JP332  [1X02_NO_SILK]  169.67,121.92 270 top
JP333  [1X05_NO_SILK]  169.67,106.68 90 top
JP334  M10SIP_NS  [1X10_NO_SILK]  162.05,121.92 180 top
JP335  FIDUCIALUFIDUCIAL  [MICRO-FIDUCIAL]  163.83,122.43 0 top
JP336  FIDUCIALUFIDUCIAL  [MICRO-FIDUCIAL]  137.92,103.89 0 top
JP337  STAND-OFF  [STAND-OFF]  176.53,102.87 0 top
JP338  STAND-OFF  [STAND-OFF]  176.53,120.65 0 top
JP339  STAND-OFF  [STAND-OFF]  207.01,102.87 0 top
JP340  STAND-OFF  [STAND-OFF]  207.01,120.65 0 top
JP341  [1X02_NO_SILK]  172.72,101.6 90 top
JP342  [1X02_NO_SILK]  172.72,121.92 270 top
JP343  [1X02_NO_SILK]  210.82,101.6 90 top
JP344  [1X02_NO_SILK]  210.82,121.92 270 top
JP345  [1X05_NO_SILK]  210.82,106.68 90 top
JP346  M10SIP_NS  [1X10_NO_SILK]  203.2,121.92 180 top
JP347  FIDUCIALUFIDUCIAL  [MICRO-FIDUCIAL]  204.98,122.43 0 top
JP348  FIDUCIALUFIDUCIAL  [MICRO-FIDUCIAL]  179.07,103.89 0 top
JP349  STAND-OFF  [STAND-OFF]  217.68,102.87 0 top
JP350  STAND-OFF  [STAND-OFF]  217.68,120.65 0 top
JP351  STAND-OFF  [STAND-OFF]  248.16,102.87 0 top
JP352  STAND-OFF  [STAND-OFF]  248.16,120.65 0 top
JP353  [1X02_NO_SILK]  213.87,101.6 90 top
JP354  [1X02_NO_SILK]  213.87,121.92 270 top
JP355  [1X02_NO_SILK]  251.97,101.6 90 top
JP356  [1X02_NO_SILK]  251.97,121.92 270 top
JP357  [1X05_NO_SILK]  251.97,106.68 90 top
JP358  M10SIP_NS  [1X10_NO_SILK]  244.35,121.92 180 top
JP359  FIDUCIALUFIDUCIAL  [MICRO-FIDUCIAL]  246.13,122.43 0 top
JP360  FIDUCIALUFIDUCIAL  [MICRO-FIDUCIAL]  220.22,103.89 0 top
LED1  7-SEGMENT-4DIGIT-YOUNGSUN  [7-SEGMENT-4DIGIT-YOUNGSUN]  27.18,18.29 0 bottom
LED2  7-SEGMENT-4DIGIT-YOUNGSUN  [7-SEGMENT-4DIGIT-YOUNGSUN]  68.33,18.29 0 bottom
LED3  7-SEGMENT-4DIGIT-YOUNGSUN  [7-SEGMENT-4DIGIT-YOUNGSUN]  109.47,18.29 0 bottom
LED4  7-SEGMENT-4DIGIT-YOUNGSUN  [7-SEGMENT-4DIGIT-YOUNGSUN]  150.62,18.29 0 bottom
LED5  7-SEGMENT-4DIGIT-YOUNGSUN  [7-SEGMENT-4DIGIT-YOUNGSUN]  191.77,18.29 0 bottom
LED6  7-SEGMENT-4DIGIT-YOUNGSUN  [7-SEGMENT-4DIGIT-YOUNGSUN]  232.92,18.29 0 bottom
LED7  7-SEGMENT-4DIGIT-YOUNGSUN  [7-SEGMENT-4DIGIT-YOUNGSUN]  27.18,41.66 0 bottom
LED8  7-SEGMENT-4DIGIT-YOUNGSUN  [7-SEGMENT-4DIGIT-YOUNGSUN]  68.33,41.66 0 bottom
LED9  7-SEGMENT-4DIGIT-YOUNGSUN  [7-SEGMENT-4DIGIT-YOUNGSUN]  109.47,41.66 0 bottom
LED10  7-SEGMENT-4DIGIT-YOUNGSUN  [7-SEGMENT-4DIGIT-YOUNGSUN]  150.62,41.66 0 bottom
LED11  7-SEGMENT-4DIGIT-YOUNGSUN  [7-SEGMENT-4DIGIT-YOUNGSUN]  191.77,41.66 0 bottom
LED12  7-SEGMENT-4DIGIT-YOUNGSUN  [7-SEGMENT-4DIGIT-YOUNGSUN]  232.92,41.66 0 bottom
LED13  7-SEGMENT-4DIGIT-YOUNGSUN  [7-SEGMENT-4DIGIT-YOUNGSUN]  27.18,65.02 0 bottom
LED14  7-SEGMENT-4DIGIT-YOUNGSUN  [7-SEGMENT-4DIGIT-YOUNGSUN]  68.33,65.02 0 bottom
LED15  7-SEGMENT-4DIGIT-YOUNGSUN  [7-SEGMENT-4DIGIT-YOUNGSUN]  109.47,65.02 0 bottom
LED16  7-SEGMENT-4DIGIT-YOUNGSUN  [7-SEGMENT-4DIGIT-YOUNGSUN]  150.62,65.02 0 bottom
LED17  7-SEGMENT-4DIGIT-YOUNGSUN  [7-SEGMENT-4DIGIT-YOUNGSUN]  191.77,65.02 0 bottom
LED18  7-SEGMENT-4DIGIT-YOUNGSUN  [7-SEGMENT-4DIGIT-YOUNGSUN]  232.92,65.02 0 bottom
LED19  7-SEGMENT-4DIGIT-YOUNGSUN  [7-SEGMENT-4DIGIT-YOUNGSUN]  27.18,88.39 0 bottom
LED20  7-SEGMENT-4DIGIT-YOUNGSUN  [7-SEGMENT-4DIGIT-YOUNGSUN]  68.33,88.39 0 bottom
LED21  7-SEGMENT-4DIGIT-YOUNGSUN  [7-SEGMENT-4DIGIT-YOUNGSUN]  109.47,88.39 0 bottom
LED22  7-SEGMENT-4DIGIT-YOUNGSUN  [7-SEGMENT-4DIGIT-YOUNGSUN]  150.62,88.39 0 bottom
LED23  7-SEGMENT-4DIGIT-YOUNGSUN  [7-SEGMENT-4DIGIT-YOUNGSUN]  191.77,88.39 0 bottom
LED24  7-SEGMENT-4DIGIT-YOUNGSUN  [7-SEGMENT-4DIGIT-YOUNGSUN]  232.92,88.39 0 bottom
LED25  7-SEGMENT-4DIGIT-YOUNGSUN  [7-SEGMENT-4DIGIT-YOUNGSUN]  27.18,111.76 0 bottom
LED26  7-SEGMENT-4DIGIT-YOUNGSUN  [7-SEGMENT-4DIGIT-YOUNGSUN]  68.33,111.76 0 bottom
LED27  7-SEGMENT-4DIGIT-YOUNGSUN  [7-SEGMENT-4DIGIT-YOUNGSUN]  109.47,111.76 0 bottom
LED28  7-SEGMENT-4DIGIT-YOUNGSUN  [7-SEGMENT-4DIGIT-YOUNGSUN]  150.62,111.76 0 bottom
LED29  7-SEGMENT-4DIGIT-YOUNGSUN  [7-SEGMENT-4DIGIT-YOUNGSUN]  191.77,111.76 0 bottom
LED30  7-SEGMENT-4DIGIT-YOUNGSUN  [7-SEGMENT-4DIGIT-YOUNGSUN]  232.92,111.76 0 bottom
R1  10k  [0402-RES]  39.88,19.56 0 top
R2  1k  [0402-RES]  25.91,21.46 180 top
R3  1k  [0402-RES]  29.72,21.46 180 top
R4  1k  [0402-RES]  36.07,21.46 180 top
R5  10k  [0402-RES]  81.03,19.56 0 top
R6  1k  [0402-RES]  29.72,15.11 180 top
R7  1k  [0402-RES]  25.91,15.11 180 top
R8  1k  [0402-RES]  22.1,21.46 180 top
R9  1k  [0402-RES]  32.26,21.46 180 top
R10  1k  [0402-RES]  22.1,15.11 180 top
R11  1k  [0402-RES]  67.06,21.46 180 top
R12  1k  [0402-RES]  70.87,21.46 180 top
R13  1k  [0402-RES]  77.22,21.46 180 top
R14  1k  [0402-RES]  70.87,15.11 180 top
R15  1k  [0402-RES]  67.06,15.11 180 top
R16  1k  [0402-RES]  63.25,21.46 180 top
R17  1k  [0402-RES]  73.41,21.46 180 top
R18  1k  [0402-RES]  63.25,15.11 180 top
R19  10k  [0402-RES]  122.17,19.56 0 top
R20  1k  [0402-RES]  108.2,21.46 180 top
R21  1k  [0402-RES]  112.01,21.46 180 top
R22  1k  [0402-RES]  118.36,21.46 180 top
R23  1k  [0402-RES]  112.01,15.11 180 top
R24  1k  [0402-RES]  108.2,15.11 180 top
R25  1k  [0402-RES]  104.39,21.46 180 top
R26  1k  [0402-RES]  114.55,21.46 180 top
R27  1k  [0402-RES]  104.39,15.11 180 top
R28  10k  [0402-RES]  163.32,19.56 0 top
R29  1k  [0402-RES]  149.35,21.46 180 top
R30  1k  [0402-RES]  153.16,21.46 180 top
R31  1k  [0402-RES]  159.51,21.46 180 top
R32  1k  [0402-RES]  153.16,15.11 180 top
R33  1k  [0402-RES]  149.35,15.11 180 top
R34  1k  [0402-RES]  145.54,21.46 180 top
R35  1k  [0402-RES]  155.7,21.46 180 top
R36  1k  [0402-RES]  145.54,15.11 180 top
R37  10k  [0402-RES]  204.47,19.56 0 top
R38  1k  [0402-RES]  190.5,21.46 180 top
R39  1k  [0402-RES]  194.31,21.46 180 top
R40  1k  [0402-RES]  200.66,21.46 180 top
R41  1k  [0402-RES]  194.31,15.11 180 top
R42  1k  [0402-RES]  190.5,15.11 180 top
R43  1k  [0402-RES]  186.69,21.46 180 top
R44  1k  [0402-RES]  196.85,21.46 180 top
R45  1k  [0402-RES]  186.69,15.11 180 top
R46  10k  [0402-RES]  245.62,19.56 0 top
R47  1k  [0402-RES]  231.65,21.46 180 top
R48  1k  [0402-RES]  235.46,21.46 180 top
R49  1k  [0402-RES]  241.81,21.46 180 top
R50  1k  [0402-RES]  235.46,15.11 180 top
R51  1k  [0402-RES]  231.65,15.11 180 top
R52  1k  [0402-RES]  227.84,21.46 180 top
R53  1k  [0402-RES]  238,21.46 180 top
R54  1k  [0402-RES]  227.84,15.11 180 top
R55  10k  [0402-RES]  39.88,42.93 0 top
R56  1k  [0402-RES]  25.91,44.83 180 top
R57  1k  [0402-RES]  29.72,44.83 180 top
R58  1k  [0402-RES]  36.07,44.83 180 top
R59  1k  [0402-RES]  29.72,38.48 180 top
R60  1k  [0402-RES]  25.91,38.48 180 top
R61  1k  [0402-RES]  22.1,44.83 180 top
R62  1k  [0402-RES]  32.26,44.83 180 top
R63  1k  [0402-RES]  22.1,38.48 180 top
R64  10k  [0402-RES]  81.03,42.93 0 top
R65  1k  [0402-RES]  67.06,44.83 180 top
R66  1k  [0402-RES]  70.87,44.83 180 top
R67  1k  [0402-RES]  77.22,44.83 180 top
R68  1k  [0402-RES]  70.87,38.48 180 top
R69  1k  [0402-RES]  67.06,38.48 180 top
R70  1k  [0402-RES]  63.25,44.83 180 top
R71  1k  [0402-RES]  73.41,44.83 180 top
R72  1k  [0402-RES]  63.25,38.48 180 top
R73  10k  [0402-RES]  122.17,42.93 0 top
R74  1k  [0402-RES]  108.2,44.83 180 top
R75  1k  [0402-RES]  112.01,44.83 180 top
R76  1k  [0402-RES]  118.36,44.83 180 top
R77  1k  [0402-RES]  112.01,38.48 180 top
R78  1k  [0402-RES]  108.2,38.48 180 top
R79  1k  [0402-RES]  104.39,44.83 180 top
R80  1k  [0402-RES]  114.55,44.83 180 top
R81  1k  [0402-RES]  104.39,38.48 180 top
R82  10k  [0402-RES]  163.32,42.93 0 top
R83  1k  [0402-RES]  149.35,44.83 180 top
R84  1k  [0402-RES]  153.16,44.83 180 top
R85  1k  [0402-RES]  159.51,44.83 180 top
R86  1k  [0402-RES]  153.16,38.48 180 top
R87  1k  [0402-RES]  149.35,38.48 180 top
R88  1k  [0402-RES]  145.54,44.83 180 top
R89  1k  [0402-RES]  155.7,44.83 180 top
R90  1k  [0402-RES]  145.54,38.48 180 top
R91  10k  [0402-RES]  204.47,42.93 0 top
R92  1k  [0402-RES]  190.5,44.83 180 top
R93  1k  [0402-RES]  194.31,44.83 180 top
R94  1k  [0402-RES]  200.66,44.83 180 top
R95  1k  [0402-RES]  194.31,38.48 180 top
R96  1k  [0402-RES]  190.5,38.48 180 top
R97  1k  [0402-RES]  186.69,44.83 180 top
R98  1k  [0402-RES]  196.85,44.83 180 top
R99  1k  [0402-RES]  186.69,38.48 180 top
R100  10k  [0402-RES]  245.62,42.93 0 top
R101  1k  [0402-RES]  231.65,44.83 180 top
R102  1k  [0402-RES]  235.46,44.83 180 top
R103  1k  [0402-RES]  241.81,44.83 180 top
R104  1k  [0402-RES]  235.46,38.48 180 top
R105  1k  [0402-RES]  231.65,38.48 180 top
R106  1k  [0402-RES]  227.84,44.83 180 top
R107  1k  [0402-RES]  238,44.83 180 top
R108  1k  [0402-RES]  227.84,38.48 180 top
R109  10k  [0402-RES]  39.88,66.29 0 top
R110  1k  [0402-RES]  25.91,68.2 180 top
R111  1k  [0402-RES]  29.72,68.2 180 top
R112  1k  [0402-RES]  36.07,68.2 180 top
R113  1k  [0402-RES]  29.72,61.85 180 top
R114  1k  [0402-RES]  25.91,61.85 180 top
R115  1k  [0402-RES]  22.1,68.2 180 top
R116  1k  [0402-RES]  32.26,68.2 180 top
R117  1k  [0402-RES]  22.1,61.85 180 top
R118  10k  [0402-RES]  81.03,66.29 0 top
R119  1k  [0402-RES]  67.06,68.2 180 top
R120  1k  [0402-RES]  70.87,68.2 180 top
R121  1k  [0402-RES]  77.22,68.2 180 top
R122  1k  [0402-RES]  70.87,61.85 180 top
R123  1k  [0402-RES]  67.06,61.85 180 top
R124  1k  [0402-RES]  63.25,68.2 180 top
R125  1k  [0402-RES]  73.41,68.2 180 top
R126  1k  [0402-RES]  63.25,61.85 180 top
R127  10k  [0402-RES]  122.17,66.29 0 top
R128  1k  [0402-RES]  108.2,68.2 180 top
R129  1k  [0402-RES]  112.01,68.2 180 top
R130  1k  [0402-RES]  118.36,68.2 180 top
R131  1k  [0402-RES]  112.01,61.85 180 top
R132  1k  [0402-RES]  108.2,61.85 180 top
R133  1k  [0402-RES]  104.39,68.2 180 top
R134  1k  [0402-RES]  114.55,68.2 180 top
R135  1k  [0402-RES]  104.39,61.85 180 top
R136  10k  [0402-RES]  163.32,66.29 0 top
R137  1k  [0402-RES]  149.35,68.2 180 top
R138  1k  [0402-RES]  153.16,68.2 180 top
R139  1k  [0402-RES]  159.51,68.2 180 top
R140  1k  [0402-RES]  153.16,61.85 180 top
R141  1k  [0402-RES]  149.35,61.85 180 top
R142  1k  [0402-RES]  145.54,68.2 180 top
R143  1k  [0402-RES]  155.7,68.2 180 top
R144  1k  [0402-RES]  145.54,61.85 180 top
R145  10k  [0402-RES]  204.47,66.29 0 top
R146  1k  [0402-RES]  190.5,68.2 180 top
R147  1k  [0402-RES]  194.31,68.2 180 top
R148  1k  [0402-RES]  200.66,68.2 180 top
R149  1k  [0402-RES]  194.31,61.85 180 top
R150  1k  [0402-RES]  190.5,61.85 180 top
R151  1k  [0402-RES]  186.69,68.2 180 top
R152  1k  [0402-RES]  196.85,68.2 180 top
R153  1k  [0402-RES]  186.69,61.85 180 top
R154  10k  [0402-RES]  245.62,66.29 0 top
R155  1k  [0402-RES]  231.65,68.2 180 top
R156  1k  [0402-RES]  235.46,68.2 180 top
R157  1k  [0402-RES]  241.81,68.2 180 top
R158  1k  [0402-RES]  235.46,61.85 180 top
R159  1k  [0402-RES]  231.65,61.85 180 top
R160  1k  [0402-RES]  227.84,68.2 180 top
R161  1k  [0402-RES]  238,68.2 180 top
R162  1k  [0402-RES]  227.84,61.85 180 top
R163  10k  [0402-RES]  39.88,89.66 0 top
R164  1k  [0402-RES]  25.91,91.57 180 top
R165  1k  [0402-RES]  29.72,91.57 180 top
R166  1k  [0402-RES]  36.07,91.57 180 top
R167  1k  [0402-RES]  29.72,85.22 180 top
R168  1k  [0402-RES]  25.91,85.22 180 top
R169  1k  [0402-RES]  22.1,91.57 180 top
R170  1k  [0402-RES]  32.26,91.57 180 top
R171  1k  [0402-RES]  22.1,85.22 180 top
R172  10k  [0402-RES]  81.03,89.66 0 top
R173  1k  [0402-RES]  67.06,91.57 180 top
R174  1k  [0402-RES]  70.87,91.57 180 top
R175  1k  [0402-RES]  77.22,91.57 180 top
R176  1k  [0402-RES]  70.87,85.22 180 top
R177  1k  [0402-RES]  67.06,85.22 180 top
R178  1k  [0402-RES]  63.25,91.57 180 top
R179  1k  [0402-RES]  73.41,91.57 180 top
R180  1k  [0402-RES]  63.25,85.22 180 top
R181  10k  [0402-RES]  122.17,89.66 0 top
R182  1k  [0402-RES]  108.2,91.57 180 top
R183  1k  [0402-RES]  112.01,91.57 180 top
R184  1k  [0402-RES]  118.36,91.57 180 top
R185  1k  [0402-RES]  112.01,85.22 180 top
R186  1k  [0402-RES]  108.2,85.22 180 top
R187  1k  [0402-RES]  104.39,91.57 180 top
R188  1k  [0402-RES]  114.55,91.57 180 top
R189  1k  [0402-RES]  104.39,85.22 180 top
R190  10k  [0402-RES]  163.32,89.66 0 top
R191  1k  [0402-RES]  149.35,91.57 180 top
R192  1k  [0402-RES]  153.16,91.57 180 top
R193  1k  [0402-RES]  159.51,91.57 180 top
R194  1k  [0402-RES]  153.16,85.22 180 top
R195  1k  [0402-RES]  149.35,85.22 180 top
R196  1k  [0402-RES]  145.54,91.57 180 top
R197  1k  [0402-RES]  155.7,91.57 180 top
R198  1k  [0402-RES]  145.54,85.22 180 top
R199  10k  [0402-RES]  204.47,89.66 0 top
R200  1k  [0402-RES]  190.5,91.57 180 top
R201  1k  [0402-RES]  194.31,91.57 180 top
R202  1k  [0402-RES]  200.66,91.57 180 top
R203  1k  [0402-RES]  194.31,85.22 180 top
R204  1k  [0402-RES]  190.5,85.22 180 top
R205  1k  [0402-RES]  186.69,91.57 180 top
R206  1k  [0402-RES]  196.85,91.57 180 top
R207  1k  [0402-RES]  186.69,85.22 180 top
R208  10k  [0402-RES]  245.62,89.66 0 top
R209  1k  [0402-RES]  231.65,91.57 180 top
R210  1k  [0402-RES]  235.46,91.57 180 top
R211  1k  [0402-RES]  241.81,91.57 180 top
R212  1k  [0402-RES]  235.46,85.22 180 top
R213  1k  [0402-RES]  231.65,85.22 180 top
R214  1k  [0402-RES]  227.84,91.57 180 top
R215  1k  [0402-RES]  238,91.57 180 top
R216  1k  [0402-RES]  227.84,85.22 180 top
R217  10k  [0402-RES]  39.88,113.03 0 top
R218  1k  [0402-RES]  25.91,114.94 180 top
R219  1k  [0402-RES]  29.72,114.94 180 top
R220  1k  [0402-RES]  36.07,114.94 180 top
R221  1k  [0402-RES]  29.72,108.58 180 top
R222  1k  [0402-RES]  25.91,108.58 180 top
R223  1k  [0402-RES]  22.1,114.94 180 top
R224  1k  [0402-RES]  32.26,114.94 180 top
R225  1k  [0402-RES]  22.1,108.58 180 top
R226  10k  [0402-RES]  81.03,113.03 0 top
R227  1k  [0402-RES]  67.06,114.94 180 top
R228  1k  [0402-RES]  70.87,114.94 180 top
R229  1k  [0402-RES]  77.22,114.94 180 top
R230  1k  [0402-RES]  70.87,108.58 180 top
R231  1k  [0402-RES]  67.06,108.58 180 top
R232  1k  [0402-RES]  63.25,114.94 180 top
R233  1k  [0402-RES]  73.41,114.94 180 top
R234  1k  [0402-RES]  63.25,108.58 180 top
R235  10k  [0402-RES]  122.17,113.03 0 top
R236  1k  [0402-RES]  108.2,114.94 180 top
R237  1k  [0402-RES]  112.01,114.94 180 top
R238  1k  [0402-RES]  118.36,114.94 180 top
R239  1k  [0402-RES]  112.01,108.58 180 top
R240  1k  [0402-RES]  108.2,108.58 180 top
R241  1k  [0402-RES]  104.39,114.94 180 top
R242  1k  [0402-RES]  114.55,114.94 180 top
R243  1k  [0402-RES]  104.39,108.58 180 top
R244  10k  [0402-RES]  163.32,113.03 0 top
R245  1k  [0402-RES]  149.35,114.94 180 top
R246  1k  [0402-RES]  153.16,114.94 180 top
R247  1k  [0402-RES]  159.51,114.94 180 top
R248  1k  [0402-RES]  153.16,108.58 180 top
R249  1k  [0402-RES]  149.35,108.58 180 top
R250  1k  [0402-RES]  145.54,114.94 180 top
R251  1k  [0402-RES]  155.7,114.94 180 top
R252  1k  [0402-RES]  145.54,108.58 180 top
R253  10k  [0402-RES]  204.47,113.03 0 top
R254  1k  [0402-RES]  190.5,114.94 180 top
R255  1k  [0402-RES]  194.31,114.94 180 top
R256  1k  [0402-RES]  200.66,114.94 180 top
R257  1k  [0402-RES]  194.31,108.58 180 top
R258  1k  [0402-RES]  190.5,108.58 180 top
R259  1k  [0402-RES]  186.69,114.94 180 top
R260  1k  [0402-RES]  196.85,114.94 180 top
R261  1k  [0402-RES]  186.69,108.58 180 top
R262  10k  [0402-RES]  245.62,113.03 0 top
R263  1k  [0402-RES]  231.65,114.94 180 top
R264  1k  [0402-RES]  235.46,114.94 180 top
R265  1k  [0402-RES]  241.81,114.94 180 top
R266  1k  [0402-RES]  235.46,108.58 180 top
R267  1k  [0402-RES]  231.65,108.58 180 top
R268  1k  [0402-RES]  227.84,114.94 180 top
R269  1k  [0402-RES]  238,114.94 180 top
R270  1k  [0402-RES]  227.84,108.58 180 top
U$1  LOGO-SFENW2  [SFE-NEW-WEB]  60.07,8.64 0 top
U$2  LOGO-SFESK  [SFE-LOGO-FLAME]  32.26,8.64 0 top
U$3  LOGO-SFENW2  [SFE-NEW-WEB]  18.92,8.64 0 top
U$4  OSHW-LOGOS  [OSHW-LOGO-S]  39.5,12.06 0 top
U$5  LOGO-SFESK  [SFE-LOGO-FLAME]  73.41,8.64 0 top
U$6  OSHW-LOGOS  [OSHW-LOGO-S]  80.64,12.06 0 top
U$7  LOGO-SFENW2  [SFE-NEW-WEB]  101.22,8.64 0 top
U$8  LOGO-SFESK  [SFE-LOGO-FLAME]  114.55,8.64 0 top
U$9  OSHW-LOGOS  [OSHW-LOGO-S]  121.79,12.06 0 top
U$10  LOGO-SFENW2  [SFE-NEW-WEB]  142.37,8.64 0 top
U$11  LOGO-SFESK  [SFE-LOGO-FLAME]  155.7,8.64 0 top
U$12  OSHW-LOGOS  [OSHW-LOGO-S]  162.94,12.06 0 top
U$13  LOGO-SFENW2  [SFE-NEW-WEB]  183.51,8.64 0 top
U$14  LOGO-SFESK  [SFE-LOGO-FLAME]  196.85,8.64 0 top
U$15  OSHW-LOGOS  [OSHW-LOGO-S]  204.09,12.06 0 top
U$16  LOGO-SFENW2  [SFE-NEW-WEB]  224.66,8.64 0 top
U$17  LOGO-SFESK  [SFE-LOGO-FLAME]  238,8.64 0 top
U$18  OSHW-LOGOS  [OSHW-LOGO-S]  245.24,12.06 0 top
U$19  LOGO-SFENW2  [SFE-NEW-WEB]  18.92,32 0 top
U$20  LOGO-SFESK  [SFE-LOGO-FLAME]  32.26,32 0 top
U$21  OSHW-LOGOS  [OSHW-LOGO-S]  39.5,35.43 0 top
U$22  LOGO-SFENW2  [SFE-NEW-WEB]  60.07,32 0 top
U$23  LOGO-SFESK  [SFE-LOGO-FLAME]  73.41,32 0 top
U$24  OSHW-LOGOS  [OSHW-LOGO-S]  80.64,35.43 0 top
U$25  LOGO-SFENW2  [SFE-NEW-WEB]  101.22,32 0 top
U$26  LOGO-SFESK  [SFE-LOGO-FLAME]  114.55,32 0 top
U$27  OSHW-LOGOS  [OSHW-LOGO-S]  121.79,35.43 0 top
U$28  LOGO-SFENW2  [SFE-NEW-WEB]  142.37,32 0 top
U$29  LOGO-SFESK  [SFE-LOGO-FLAME]  155.7,32 0 top
U$30  OSHW-LOGOS  [OSHW-LOGO-S]  162.94,35.43 0 top
U$31  LOGO-SFENW2  [SFE-NEW-WEB]  183.51,32 0 top
U$32  LOGO-SFESK  [SFE-LOGO-FLAME]  196.85,32 0 top
U$33  OSHW-LOGOS  [OSHW-LOGO-S]  204.09,35.43 0 top
U$34  LOGO-SFENW2  [SFE-NEW-WEB]  224.66,32 0 top
U$35  LOGO-SFESK  [SFE-LOGO-FLAME]  238,32 0 top
U$36  OSHW-LOGOS  [OSHW-LOGO-S]  245.24,35.43 0 top
U$37  LOGO-SFENW2  [SFE-NEW-WEB]  18.92,55.37 0 top
U$38  LOGO-SFESK  [SFE-LOGO-FLAME]  32.26,55.37 0 top
U$39  OSHW-LOGOS  [OSHW-LOGO-S]  39.5,58.8 0 top
U$40  LOGO-SFENW2  [SFE-NEW-WEB]  60.07,55.37 0 top
U$41  LOGO-SFESK  [SFE-LOGO-FLAME]  73.41,55.37 0 top
U$42  OSHW-LOGOS  [OSHW-LOGO-S]  80.64,58.8 0 top
U$43  LOGO-SFENW2  [SFE-NEW-WEB]  101.22,55.37 0 top
U$44  LOGO-SFESK  [SFE-LOGO-FLAME]  114.55,55.37 0 top
U$45  OSHW-LOGOS  [OSHW-LOGO-S]  121.79,58.8 0 top
U$46  LOGO-SFENW2  [SFE-NEW-WEB]  142.37,55.37 0 top
U$47  LOGO-SFESK  [SFE-LOGO-FLAME]  155.7,55.37 0 top
U$48  OSHW-LOGOS  [OSHW-LOGO-S]  162.94,58.8 0 top
U$49  LOGO-SFENW2  [SFE-NEW-WEB]  183.51,55.37 0 top
U$50  LOGO-SFESK  [SFE-LOGO-FLAME]  196.85,55.37 0 top
U$51  OSHW-LOGOS  [OSHW-LOGO-S]  204.09,58.8 0 top
U$52  LOGO-SFENW2  [SFE-NEW-WEB]  224.66,55.37 0 top
U$53  LOGO-SFESK  [SFE-LOGO-FLAME]  238,55.37 0 top
U$54  OSHW-LOGOS  [OSHW-LOGO-S]  245.24,58.8 0 top
U$55  LOGO-SFENW2  [SFE-NEW-WEB]  18.92,78.74 0 top
U$56  LOGO-SFESK  [SFE-LOGO-FLAME]  32.26,78.74 0 top
U$57  OSHW-LOGOS  [OSHW-LOGO-S]  39.5,82.17 0 top
U$58  LOGO-SFENW2  [SFE-NEW-WEB]  60.07,78.74 0 top
U$59  LOGO-SFESK  [SFE-LOGO-FLAME]  73.41,78.74 0 top
U$60  OSHW-LOGOS  [OSHW-LOGO-S]  80.64,82.17 0 top
U$61  LOGO-SFENW2  [SFE-NEW-WEB]  101.22,78.74 0 top
U$62  LOGO-SFESK  [SFE-LOGO-FLAME]  114.55,78.74 0 top
U$63  OSHW-LOGOS  [OSHW-LOGO-S]  121.79,82.17 0 top
U$64  LOGO-SFENW2  [SFE-NEW-WEB]  142.37,78.74 0 top
U$65  LOGO-SFESK  [SFE-LOGO-FLAME]  155.7,78.74 0 top
U$66  OSHW-LOGOS  [OSHW-LOGO-S]  162.94,82.17 0 top
U$67  LOGO-SFENW2  [SFE-NEW-WEB]  183.51,78.74 0 top
U$68  LOGO-SFESK  [SFE-LOGO-FLAME]  196.85,78.74 0 top
U$69  OSHW-LOGOS  [OSHW-LOGO-S]  204.09,82.17 0 top
U$70  LOGO-SFENW2  [SFE-NEW-WEB]  224.66,78.74 0 top
U$71  LOGO-SFESK  [SFE-LOGO-FLAME]  238,78.74 0 top
U$72  OSHW-LOGOS  [OSHW-LOGO-S]  245.24,82.17 0 top
U$73  LOGO-SFENW2  [SFE-NEW-WEB]  18.92,102.11 0 top
U$74  LOGO-SFESK  [SFE-LOGO-FLAME]  32.26,102.11 0 top
U$75  OSHW-LOGOS  [OSHW-LOGO-S]  39.5,105.54 0 top
U$76  LOGO-SFENW2  [SFE-NEW-WEB]  60.07,102.11 0 top
U$77  LOGO-SFESK  [SFE-LOGO-FLAME]  73.41,102.11 0 top
U$78  OSHW-LOGOS  [OSHW-LOGO-S]  80.64,105.54 0 top
U$79  LOGO-SFENW2  [SFE-NEW-WEB]  101.22,102.11 0 top
U$80  LOGO-SFESK  [SFE-LOGO-FLAME]  114.55,102.11 0 top
U$81  OSHW-LOGOS  [OSHW-LOGO-S]  121.79,105.54 0 top
U$82  LOGO-SFENW2  [SFE-NEW-WEB]  142.37,102.11 0 top
U$83  LOGO-SFESK  [SFE-LOGO-FLAME]  155.7,102.11 0 top
U$84  OSHW-LOGOS  [OSHW-LOGO-S]  162.94,105.54 0 top
U$85  LOGO-SFENW2  [SFE-NEW-WEB]  183.51,102.11 0 top
U$86  LOGO-SFESK  [SFE-LOGO-FLAME]  196.85,102.11 0 top
U$87  OSHW-LOGOS  [OSHW-LOGO-S]  204.09,105.54 0 top
U$88  LOGO-SFENW2  [SFE-NEW-WEB]  224.66,102.11 0 top
U$89  LOGO-SFESK  [SFE-LOGO-FLAME]  238,102.11 0 top
U$90  OSHW-LOGOS  [OSHW-LOGO-S]  245.24,105.54 0 top

## Library data of the parts
ATMEGA328P-AU ATMEGA328P-AU1-ATMEGA328P-AU29 C1 C2 C7 C10 C13 C16 C19 C22 C25 C28 C31 C34 C37 C40 C43 C46 C49 C52 C55 C58 C61 C64 C67 C70 C73 C76 C79 C82 C85 C88 JP9 JP10 JP23 JP24 JP35 JP36 JP47 JP48 JP59 JP60 JP71 JP72 JP83 JP84 JP95 JP96 JP107 JP108 JP119 JP120 JP131 JP132 JP143 JP144 JP155 JP156 JP167 JP168 JP179 JP180 JP191 JP192 JP203 JP204 JP215 JP216 JP227 JP228 JP239 JP240 JP251 JP252 JP263 JP264 JP275 JP276 JP287 JP288 JP299 JP300 JP311 JP312 JP323 JP324 JP335 JP336 JP347 JP348 JP359 JP360 LED1-LED30 R1-R270 U$1-U$3 U$5 U$7 U$8 U$10 U$11 U$13 U$14 U$16 U$17 U$19 U$20 U$22 U$23 U$25 U$26 U$28 U$29 U$31 U$32 U$34 U$35 U$37 U$38 U$40 U$41 U$43 U$44 U$46 U$47 U$49 U$50 U$52 U$53 U$55 U$56 U$58 U$59 U$61 U$62 U$64 U$65 U$67 U$68 U$70 U$71 U$73 U$74 U$76 U$77 U$79 U$80 U$82 U$83 U$85 U$86 U$88 U$89 = SparkFun
C3-C6 C8 C9 C11 C12 C14 C15 C17 C18 C20 C21 C23 C24 C26 C27 C29 C30 C32 C33 C35 C36 C38 C39 C41 C42 C44 C45 C47 C48 C50 C51 C53 C54 C56 C57 C59 C60 C62 C63 C65 C66 C68 C69 C71 C72 C74 C75 C77 C78 C80 C81 C83 C84 C86 C87 C89 C90 = SparkFun-Passives
E$1 = SparkFun-Retired
E$5 E$6 U$4 U$6 U$9 U$12 U$15 U$18 U$21 U$24 U$27 U$30 U$33 U$36 U$39 U$42 U$45 U$48 U$51 U$54 U$57 U$60 U$63 U$66 U$69 U$72 U$75 U$78 U$81 U$84 U$87 U$90 = SparkFun-Aesthetics
JP1 JP3-JP5 JP13-JP16 JP25-JP28 JP37-JP40 JP49-JP52 JP61-JP64 JP73-JP76 JP85-JP88 JP97-JP100 JP109-JP112 JP121-JP124 JP133-JP136 JP145-JP148 JP157-JP160 JP169-JP172 JP181-JP184 JP193-JP196 JP205-JP208 JP217-JP220 JP229-JP232 JP241-JP244 JP253-JP256 JP265-JP268 JP277-JP280 JP289-JP292 JP301-JP304 JP313-JP316 JP325-JP328 JP337-JP340 JP349-JP352 = SparkFun-Electromechanical
JP2 JP6-JP8 JP11 JP12 JP17-JP22 JP29-JP34 JP41-JP46 JP53-JP58 JP65-JP70 JP77-JP82 JP89-JP94 JP101-JP106 JP113-JP118 JP125-JP130 JP137-JP142 JP149-JP154 JP161-JP166 JP173-JP178 JP185-JP190 JP197-JP202 JP209-JP214 JP221-JP226 JP233-JP238 JP245-JP250 JP257-JP262 JP269-JP274 JP281-JP286 JP293-JP298 JP305-JP310 JP317-JP322 JP329-JP334 JP341-JP346 JP353-JP358 = SparkFun-Connectors